# EAGLE board buzzer (EAGLE 5.11)
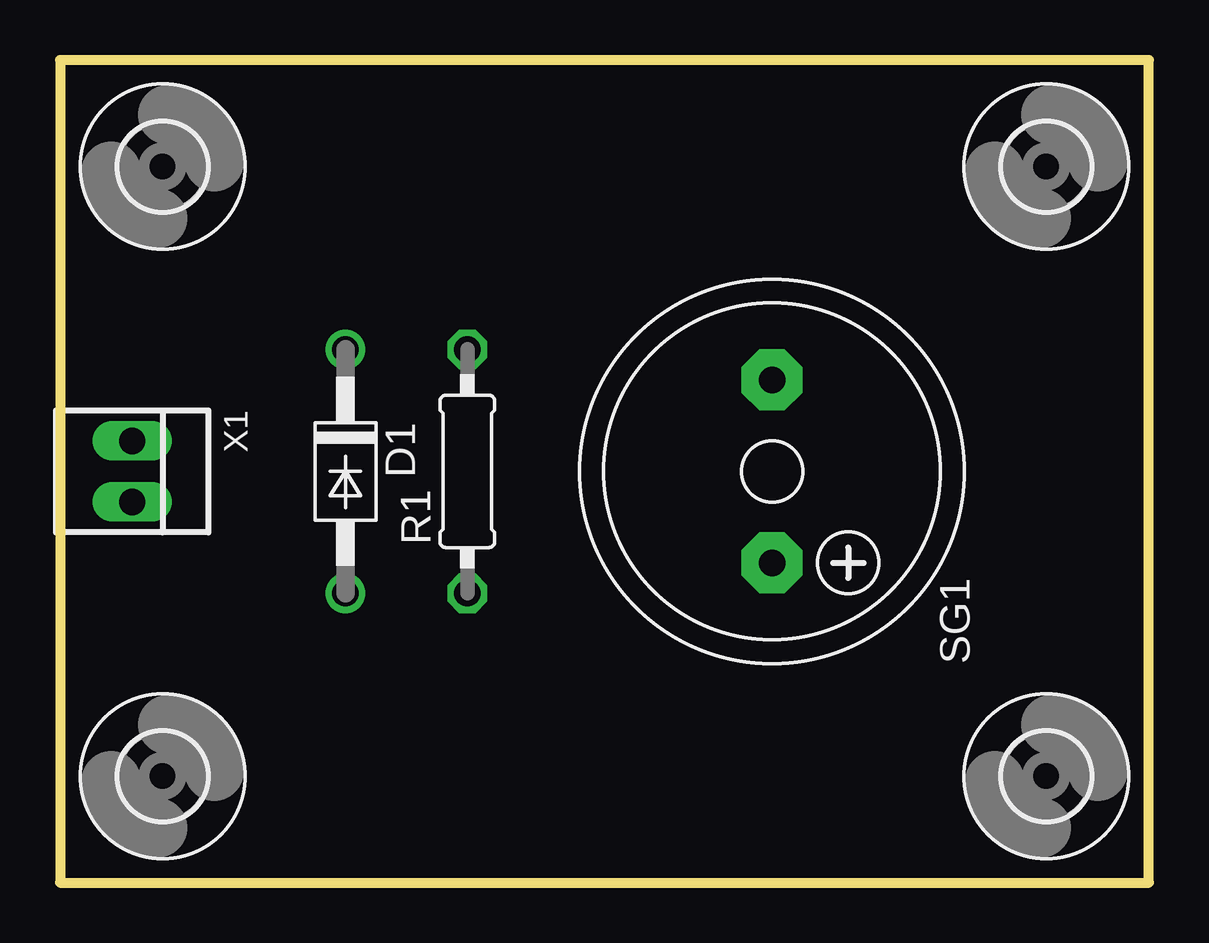
[diagram p0: board, top side]
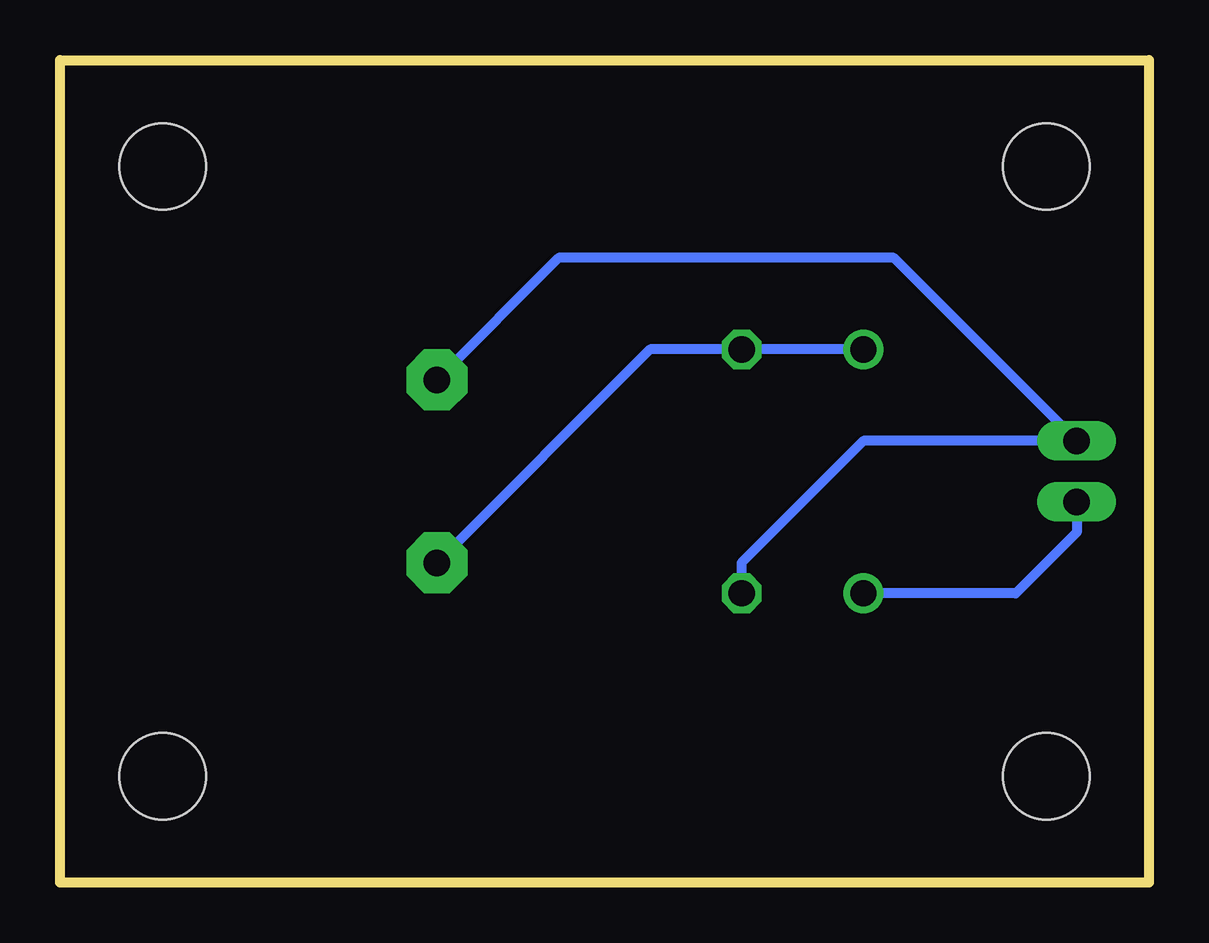
[diagram p1: board, bottom side, seen from below]

Size 45.39 x 34.28 mm. Coordinates in mm from the lower left corner, seen from the top.
Outline: 45.39,34.28 0,34.28 0,0 45.39,0 45.39,34.28
Copper layers (1*16): Top 0.035mm / dielectric 1.5mm / Bottom 0.035mm
Design rules "default": minimum track width 10mil, minimum drill 24mil, track to track 8mil, track to pad 8mil, pad to pad 8mil, via to via 8mil, smd to smd 8mil, copper to edge 40mil, drill to drill 8mil, minimum pad ring 10mil, minimum via ring 8mil, stop-mask expansion 4mil, vias tented up to drill 0mil, thermal gap 10mil

## Footprints (pad centres in the part's own frame; a part is rotated, then mirrored left to right if it is on the bottom)
DO41-10 = drill 1.1 round: A 5.08,0; C -5.08,0
0207/10 = drill 1.1 octagon: 1 -5.08,0; 2 5.08,0
F/HMB = drill 1.1 pad 2.54 octagon: + 3.81,0; - -3.81,0
3,6 = hole 3.6: 0,0
22-23-2021 = drill 1.1 long: 1 -1.27,0; 2 1.27,0

## Placement (x,y rotation side)
D1  1N4004  [DO41-10]  11.9,17.14 270 top
R1  [0207/10]  16.98,17.14 90 top
SG1  F/HMB  [F/HMB]  29.68,17.14 270 top
U$1  [3,6]  4.28,29.84 0 top
U$2  [3,6]  41.11,29.84 0 top
U$3  [3,6]  41.11,4.44 0 top
U$4  [3,6]  4.28,4.44 0 top
X1  22-23-2021  [22-23-2021]  3.01,17.14 270 top

## Library data of the parts
D1 R1 SG1 U$1-U$4 X1 = buzzer

## Nets
N$1: D1.A X1.2
N$2: D1.C R1.2 SG1.+
N$3: R1.1 SG1.- X1.1

## Tracks (layer width: path | path; a pad name or v marks a point on that pad's centre or on a via)
N$1
  Bottom 0.406: X1.2 3.01,14.6 5.55,12.06 D1.A
N$2
  Bottom 0.406: D1.C R1.2 20.79,22.22 SG1.+
N$3
  Bottom 0.406: R1.1 16.98,13.33 11.9,18.41 X1.1 10.63,26.03 24.6,26.03 SG1.-